# EAGLE board grip_strength_board (EAGLE 8.1.0)
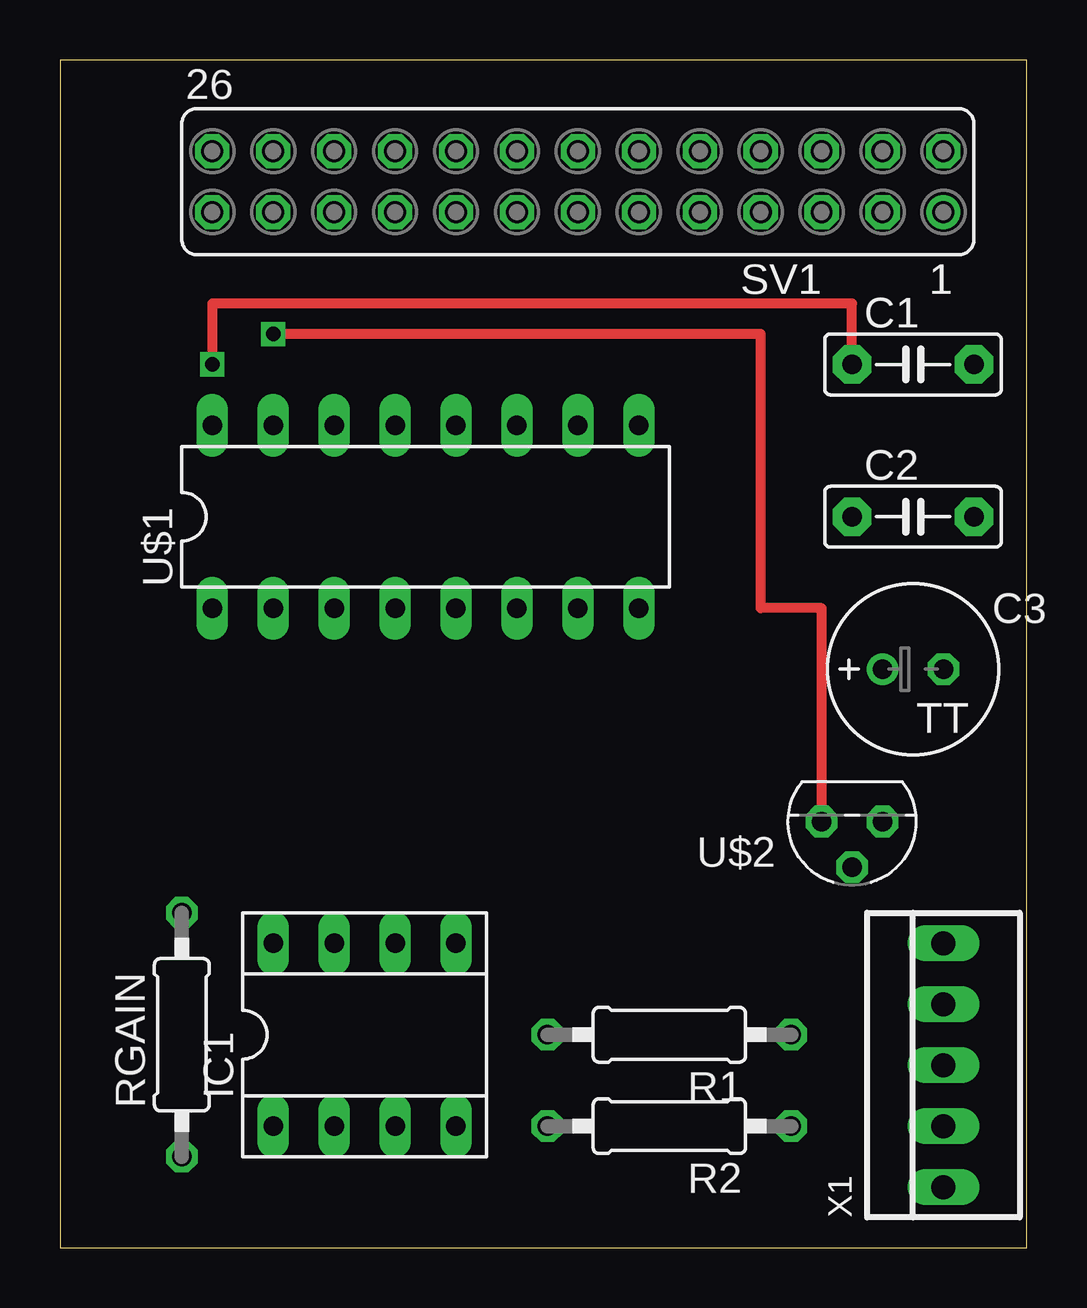
[diagram p0: board, top side]
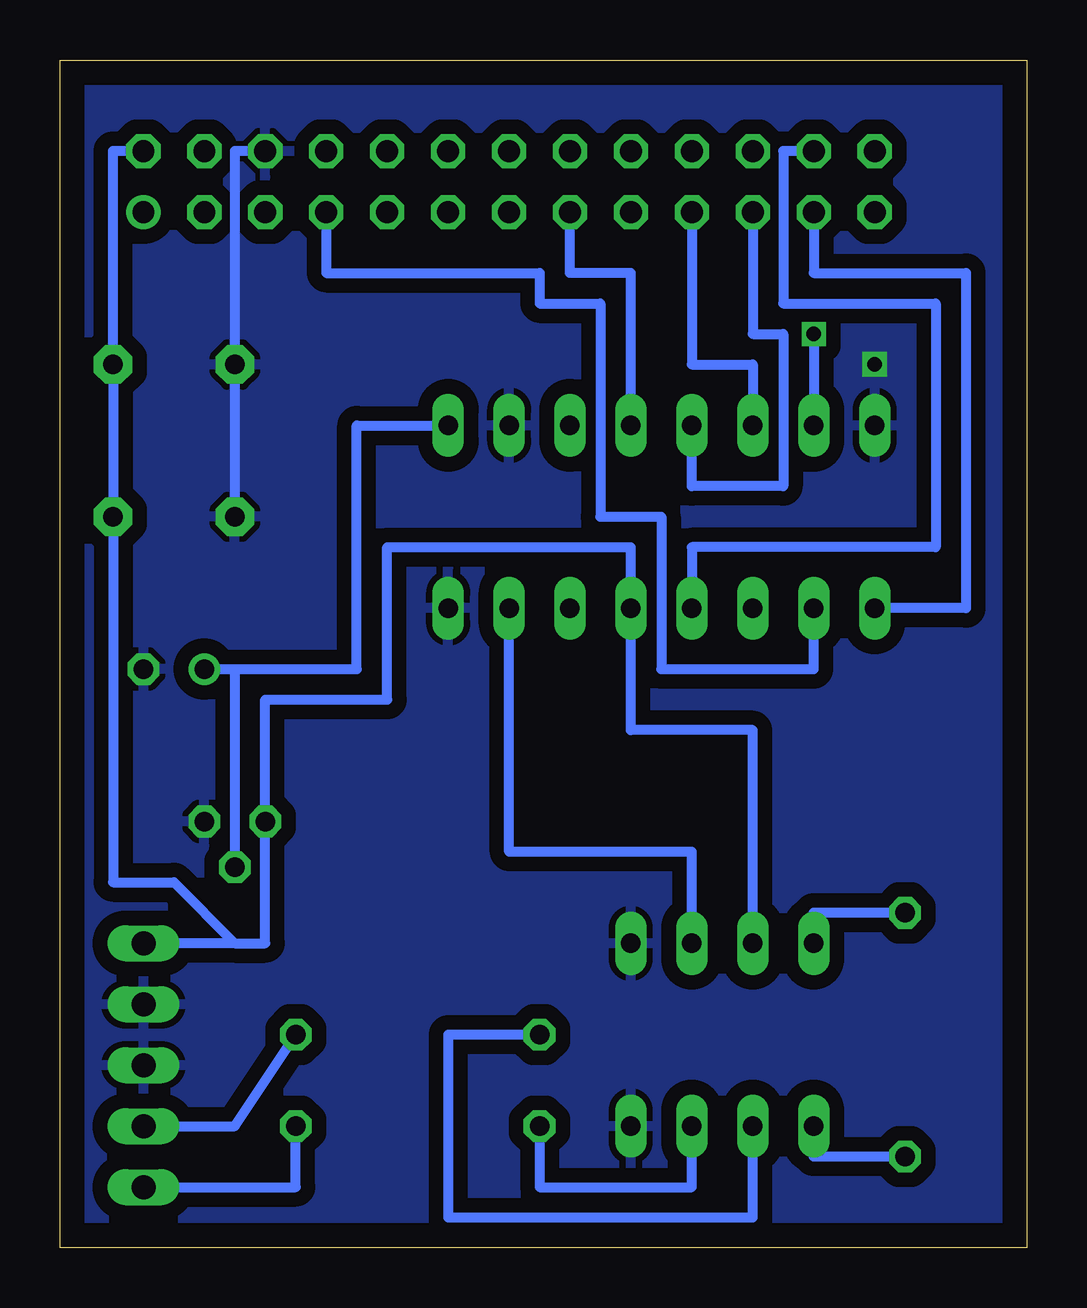
[diagram p1: board, bottom side, seen from below]

Size 40.31 x 49.52 mm. Coordinates in mm from the lower left corner, seen from the top.
Outline: 0,0 40.31,0 40.31,49.52 0,49.52 0,0
Copper layers (1*16): Top 0.035mm / dielectric 1.5mm / Bottom 0.035mm
Design rules "default": minimum track width 10mil, minimum drill 24mil, track to track 8mil, track to pad 8mil, pad to pad 8mil, via to via 8mil, smd to smd 8mil, copper to edge 40mil, drill to drill 8mil, minimum pad ring 10mil, minimum via ring 8mil, stop-mask expansion 4mil, vias tented up to drill 0mil, thermal gap 10mil

## Footprints (pad centres in the part's own frame; a part is rotated, then mirrored left to right if it is on the bottom)
C5B2.5 = drill 0.813 pad 1.6 octagon: 1 -2.54,0; 2 2.54,0
TT2D7 = drill 0.813: + -1.27,0 | drill 0.813 octagon: - 1.27,0
SOCKET-08 = drill 0.813 long: 1 -3.81,-3.81; 2 -1.27,-3.81; 3 1.27,-3.81; 4 3.81,-3.81; 5 3.81,3.81; 6 1.27,3.81; 7 -1.27,3.81; 8 -3.81,3.81
0207/10 = drill 0.813 octagon: 1 -5.08,0; 2 5.08,0
FE13-2 = drill 0.914: 1 -15.24,1.27 | drill 0.914 octagon: 2 -15.24,-1.27; 3 -12.7,1.27; 4 -12.7,-1.27; 5 -10.16,1.27; 6 -10.16,-1.27; 7 -7.62,1.27; 8 -7.62,-1.27; 9 -5.08,1.27; 10 -5.08,-1.27; 11 -2.54,1.27; 12 -2.54,-1.27; 13 0,1.27; 14 0,-1.27; 15 2.54,1.27; 16 2.54,-1.27; 17 5.08,1.27; 18 5.08,-1.27; 19 7.62,1.27; 20 7.62,-1.27; 21 10.16,1.27; 22 10.16,-1.27; 23 12.7,1.27; 24 12.7,-1.27; 25 15.24,1.27; 26 15.24,-1.27
DIP16 = drill 0.813 long: 1 -8.89,-3.81; 2 -6.35,-3.81; 3 -3.81,-3.81; 4 -1.27,-3.81; 5 1.27,-3.81; 6 3.81,-3.81; 7 6.35,-3.81; 8 8.89,-3.81; 9 8.89,3.81; 10 6.35,3.81; 11 3.81,3.81; 12 1.27,3.81; 13 -1.27,3.81; 14 -3.81,3.81; 15 -6.35,3.81; 16 -8.89,3.81
TO92 = drill 0.813 octagon: 1 -3.81,0; 2 -2.54,1.905; 3 -1.27,0
22-23-2051 = drill 1 long: 1 -5.08,0; 2 -2.54,0; 3 0,0; 4 2.54,0; 5 5.08,0

## Placement (x,y rotation side)
C1  0.1uF  [C5B2.5]  35.56,36.83 0 top
C2  10uF  [C5B2.5]  35.56,30.48 0 top
C3  1uF/tantalum  [TT2D7]  35.56,24.13 0 top
IC1  AD623BNZ  [SOCKET-08]  12.7,8.89 0 top
R1  22 Ohm  [0207/10]  25.4,8.89 180 top
R2  22 Ohm  [0207/10]  25.4,5.08 180 top
RGAIN  604  [0207/10]  5.08,8.89 90 top
SV1  RASPBERRY PI  [FE13-2]  21.59,44.45 180 top
U$1  AD7705  [DIP16]  15.24,30.48 0 top
U$2  MCP1525  [TO92]  30.48,17.78 180 top
X1  22-23-2051  [22-23-2051]  36.83,7.62 90 top

## Library data of the parts
C1 C2 = capacitor-wima
C3 = rcl
IC1 = ic-package
R1 R2 RGAIN = eagle-ltspice; SPICEMODEL: NONE; SPICEPREFIX: R
SV1 = con-lsta; OC_FARNELL: unknown; OC_NEWARK: unknown
U$1 U$2 = rpi
X1 = con-molex; MF: MOLEX; MPN: 22-23-2051; OC_FARNELL: 1462952; OC_NEWARK: 38C9178

## Nets
GND: C1.1 C2.1 C3.- IC1.4 IC1.5 SV1.6 U$1.8 U$1.10 U$1.16 U$2.1 X1.3 X1.4
N$1: IC1.1 RGAIN.1
N$2: IC1.8 RGAIN.2
N$3: R1.1 X1.2
N$4: IC1.2 R1.2
N$5: IC1.6 U$1.7
N$6: SV1.23 U$1.1
N$7: SV1.7 U$1.2
N$8: SV1.24 U$1.4
N$9: SV1.19 U$1.14
N$10: SV1.21 U$1.13
N$11: SV1.15 U$1.12
N$12: C3.+ U$1.9 U$2.2
N$13: R2.1 X1.1
N$14: IC1.3 R2.2
VDD: C1.2 C2.2 IC1.7 SV1.2 U$1.5 U$1.15 U$2.3 X1.5

## Tracks (layer width: path | path; a pad name or v marks a point on that pad's centre or on a via)
GND  (via drill 0.6)
  Top 0.406: C1.1 33.02,39.37 6.35,39.37 v6.35,36.83
  Bottom 0.406: SV1.6 33.02,45.72 C1.1 C2.1
  pour Bottom (isolate 0.61): 0,48.26 39.37,48.26 39.37,0 0,0
N$1
  Bottom 0.406: RGAIN.1 8.89,3.81 IC1.1
N$2
  Bottom 0.406: RGAIN.2 8.89,13.97 IC1.8
N$3
  Bottom 0.406: X1.2 33.02,5.08 R1.1
N$4
  Bottom 0.406: R1.2 24.13,8.89 24.13,1.27 11.43,1.27 IC1.2
N$5
  Bottom 0.406: IC1.6 13.97,16.51 21.59,16.51 U$1.7
N$6
  Bottom 0.406: SV1.23 8.89,40.64 2.54,40.64 2.54,26.67 U$1.1
N$7
  Bottom 0.406: SV1.7 29.21,40.64 20.32,40.64 20.32,39.37 17.78,39.37 17.78,30.48 15.24,30.48 15.24,24.13 8.89,24.13 U$1.2
N$8
  Bottom 0.406: SV1.24 10.16,45.72 10.16,39.37 3.81,39.37 3.81,29.21 13.97,29.21 U$1.4
N$9
  Bottom 0.406: SV1.19 13.97,36.83 11.43,36.83 U$1.14
N$10
  Bottom 0.406: SV1.21 11.43,38.1 10.16,38.1 10.16,31.75 13.97,31.75 U$1.13
N$11
  Bottom 0.406: U$1.12 16.51,40.64 19.05,40.64 SV1.15
N$12
  Bottom 0.406: 33.02,24.13 U$2.2 | C3.+ 33.02,24.13 | 33.02,24.13 27.94,24.13 27.94,34.29 U$1.9
N$13
  Bottom 0.406: X1.1 30.48,2.54 R2.1
N$14
  Bottom 0.406: R2.2 20.32,2.54 13.97,2.54 IC1.3
VDD  (via drill 0.6)
  Top 0.406: U$2.3 31.75,26.67 29.21,26.67 29.21,38.1 v8.89,38.1
  Bottom 0.406: SV1.2 38.1,45.72 C1.2 C2.2 38.1,15.24 35.56,15.24 33.02,12.7 | 33.02,12.7 31.75,12.7 U$2.3 31.75,22.86 26.67,22.86 26.67,29.21 16.51,29.21 U$1.5 16.51,21.59 11.43,21.59 IC1.7 | 33.02,12.7 X1.5 | v8.89,38.1 U$1.15